# Altium PCB Board_nonBGA.PcbDoc (part 2 of 2)
Units mil, origin at the board's own origin, x right, y up, seen from the top; angles counter-clockwise.
Board outline 6000 x 4000 mil, 2 copper layers (Top Layer, Bottom Layer); 87 components, 98 nets, 630 pads, 48 vias.
Unrouted connection lines stored in the file: 240.
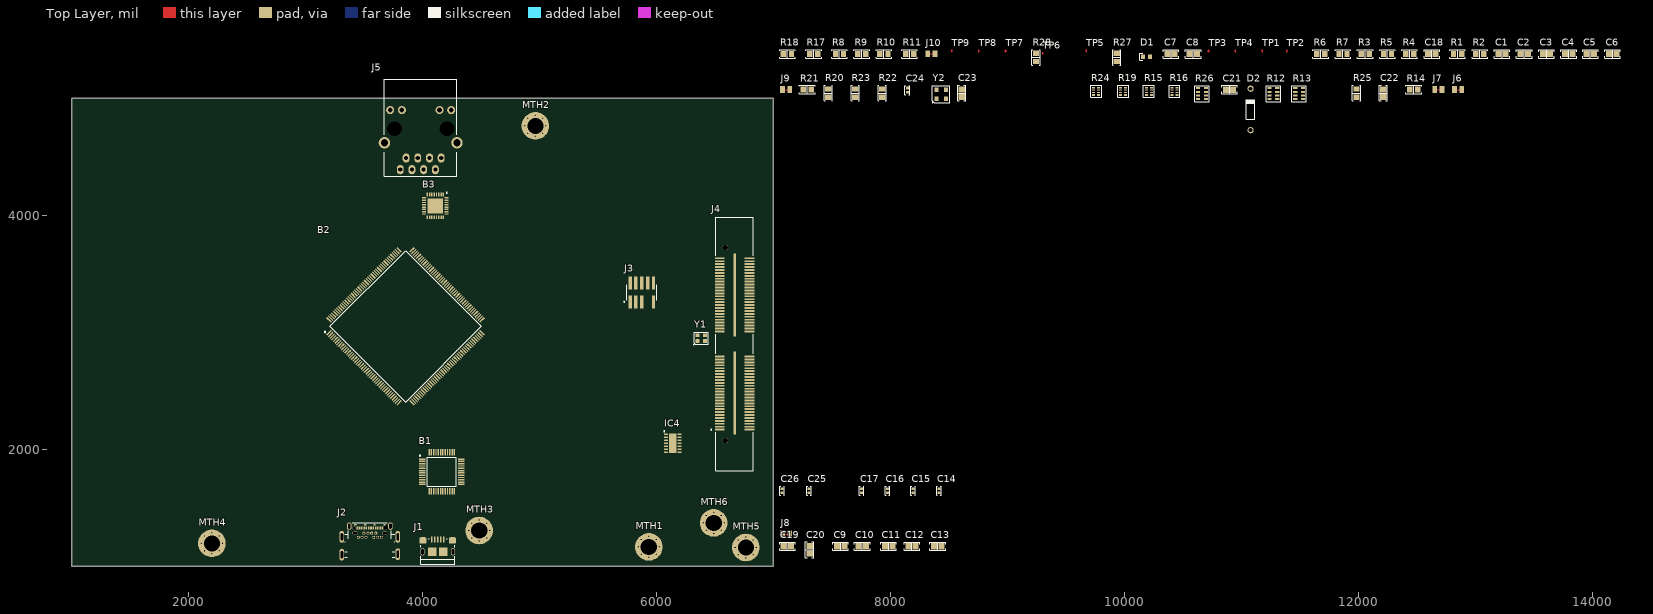
[diagram p0: Top Layer view]

## Via types
v1: diameter 19.68, hole 11.81, Top Layer to Bottom Layer, 48 vias

## Nets (pads, with @x,y where several pads share a name; then routed paths per layer and width w, separated by ;. In a path a pad name is that pad's centre, name@x,y a point inside that pad or via, vN(x,y) a via of type N, cw(c..) or ccw(c..) an arc to the next point about the centre after c; other vN are vias at no path point) (continued)
SIG_GND: B1.6 B1.13 B1.31 B1.43 B1.44 B2.22 B2.28 B2.31 B2.45 B2.59 B2.83 B2.95 B2.105 B2.115 B2.131 B2.141 B2.150 B2.170 B3.3 B3.9 B3.33 C1.1 C2.1 C3.1 C4.1 C5.1 C6.1 C7.1 C8.1 C10.1 C11.1 C12.1 C13.1 C14.1 C15.1 C16.1 C17.1 C18.1 C19.1 C20.1 C21.2 C22.2 C23.2 C24.1 C25.1 C26.1 IC4.7 IC4.15 J1.5 J2.A1 J2.A12 J2.B1 J2.B12 J3.03 J3.05 J4.06 J4.10 J4.16 J4.22 J4.28 J4.36 J4.46 J4.G1 J4.G2 R3.2 R17.2 R18.2 R22.2 R26.1 R26.2 R26.3 Y1.2 Y1.4 Y2.2
TP_A_N: B3.2 J5.3
TP_A_P: B3.1 J5.1
TP_B_N: B3.5 J5.4
TP_B_P: B3.6 J5.6
TXCLK: B3.22 R12.6
USB_DEBUG_N: B1.14 J1.2 J2.A7 J2.B7
USB_DEBUG_P: B1.15 J1.3 J2.A6 J2.B6
pads on no net: B1.1 B1.2 B1.5 B1.10 B1.11 B1.17 B1.18 B1.24 B1.25 B1.26 B1.27 B1.32 B1.37 B1.38 B1.39 B1.40 B1.42 B1.46 B1.47 B1.48 B2.14 B2.15 B2.16 B2.17 B2.19 B2.20 B2.21 B2.23 B2.24 B2.26 B2.27 B2.29 B2.30 B2.33 B2.34 B2.35 B2.38 B2.39 B2.40 B2.41 B2.42 B2.43 B2.44 B2.46 B2.47 B2.49 B2.50 B2.51 B2.52 B2.53 B2.54 B2.55 B2.56 B2.57 B2.58 B2.61 B2.66 B2.67 B2.68 B2.69 B2.70 B2.71 B2.72 B2.73 B2.74 B2.75 B2.76 B2.77 B2.94 B2.97 B2.98 B2.99 B2.100 B2.101 B2.102 B2.103 B2.104 B2.106 B2.107 B2.108 B2.109 B2.110 B2.113 B2.114 B2.116 B2.117 B2.118 B2.119 B2.120 B2.121 B2.122 B2.123 B2.124 B2.125 B2.126 B2.129 B2.130 B2.132 B2.133 B2.134 B2.135 B2.136 B2.137 B2.138 B2.139 B2.140 B2.142 B2.143 B2.144 B2.145 B2.146 B2.147 B2.148 B2.149 B2.151 B2.152 B2.153 B2.154 B2.155 B2.156 B2.157 B2.158 B2.159 B2.160 B2.161 B2.162 B2.163 B2.164 B2.165 B2.166 B2.167 B2.171 B2.172 B2.173 B2.174 B2.175 B2.176 B3.8 B3.10 B3.27 B3.28 B3.29 C9.1 D2.2 IC4.3 IC4.4 IC4.5 IC4.6 IC4.8 IC4.9 IC4.10 IC4.11 IC4.12 IC4.13 IC4.14 J1.4 J2.A2 J2.A3 J2.A8 J2.A10 J2.A11 J2.B2 J2.B3 J2.B8 J2.B10 J2.B11 J2.M J3.09 J4. J4.02 J4.04 J4.13 J4.15 J4.17 J4.19 J4.21 J4.23 J4.25 J4.27 J4.29 J4.31 J4.33 J4.35 J4.37 J4.39 J4.41 J4.43 J4.45 J4.47 J4.48 J4.49 J4.50 J4.51 J4.52 J4.53 J4.54 J4.55 J4.56 J4.57 J4.58 J4.59 J4.60 J4.61 J4.62 J4.63 J4.64 J4.65 J4.66 J4.67 J4.68 J4.69 J4.70 J4.71 J4.72 J4.73 J4.74 J4.75 J4.76 J4.77 J4.78 J4.79 J4.80 J4.81 J4.82 J4.83 J4.84 J4.85 J4.86 J4.87 J4.88 J4.89 J4.90 J4.91 J4.92 J4.93 J4.94 J4.95 J4.96 J4.97 J4.98 J4.99 J4.100 J4.101 J4.102 J4.103 J4.104 J5.2 J5.5 J5.7 J5.8 J5.M J6.1 J6.2 J7.1 J7.2 J8.1 J8.2 J9.1 J9.2 J10.1 J10.2 MTH1.1 MTH2.1 MTH3.1 MTH4.1 MTH5.1 MTH6.1 R12.7 R13.1 R13.7 R24.1 R24.2 R24.3 R24.6 R24.7 R24.8 R26.4 R26.5
copper on no net:
  other v1: 6765,1070 5935,1075 6701.36,1096.36 6828.64,1096.36 5871.36,1101.36 5998.64,1101.36 2200,1105 2136.36,1131.36 2263.64,1131.36 6675,1160 6855,1160 5845,1165 6025,1165 2110,1195 2290,1195 4485,1215 6701.36,1223.64 6828.64,1223.64 5871.36,1228.64 5998.64,1228.64 4421.36,1241.36 4548.64,1241.36 6765,1250 5935,1255 2136.36,1258.64 2263.64,1258.64 6490,1280 2200,1285 4395,1305 4575,1305 6426.36,1306.36 6553.64,1306.36 4421.36,1368.64 4548.64,1368.64 6400,1370 6580,1370 4485,1395 6426.36,1433.64 6553.64,1433.64 6490,1460 4965,4675 4901.36,4701.36 5028.64,4701.36 4875,4765 5055,4765 4901.36,4828.64 5028.64,4828.64 4965,4855

## Text inside footprints (layer, text, board x,y; h text height)
D1: Mechanical 13 "+" at 10241.84,5378.96 h19.68